# Altium PCB Klotz.PcbDoc
Units mm, origin at the board's own origin, x right, y up, seen from the top; angles counter-clockwise.
Board outline 48 x 51 mm, 2 copper layers (Top Layer, Bottom Layer); 40 components, 33 nets, 160 pads, 28 vias.
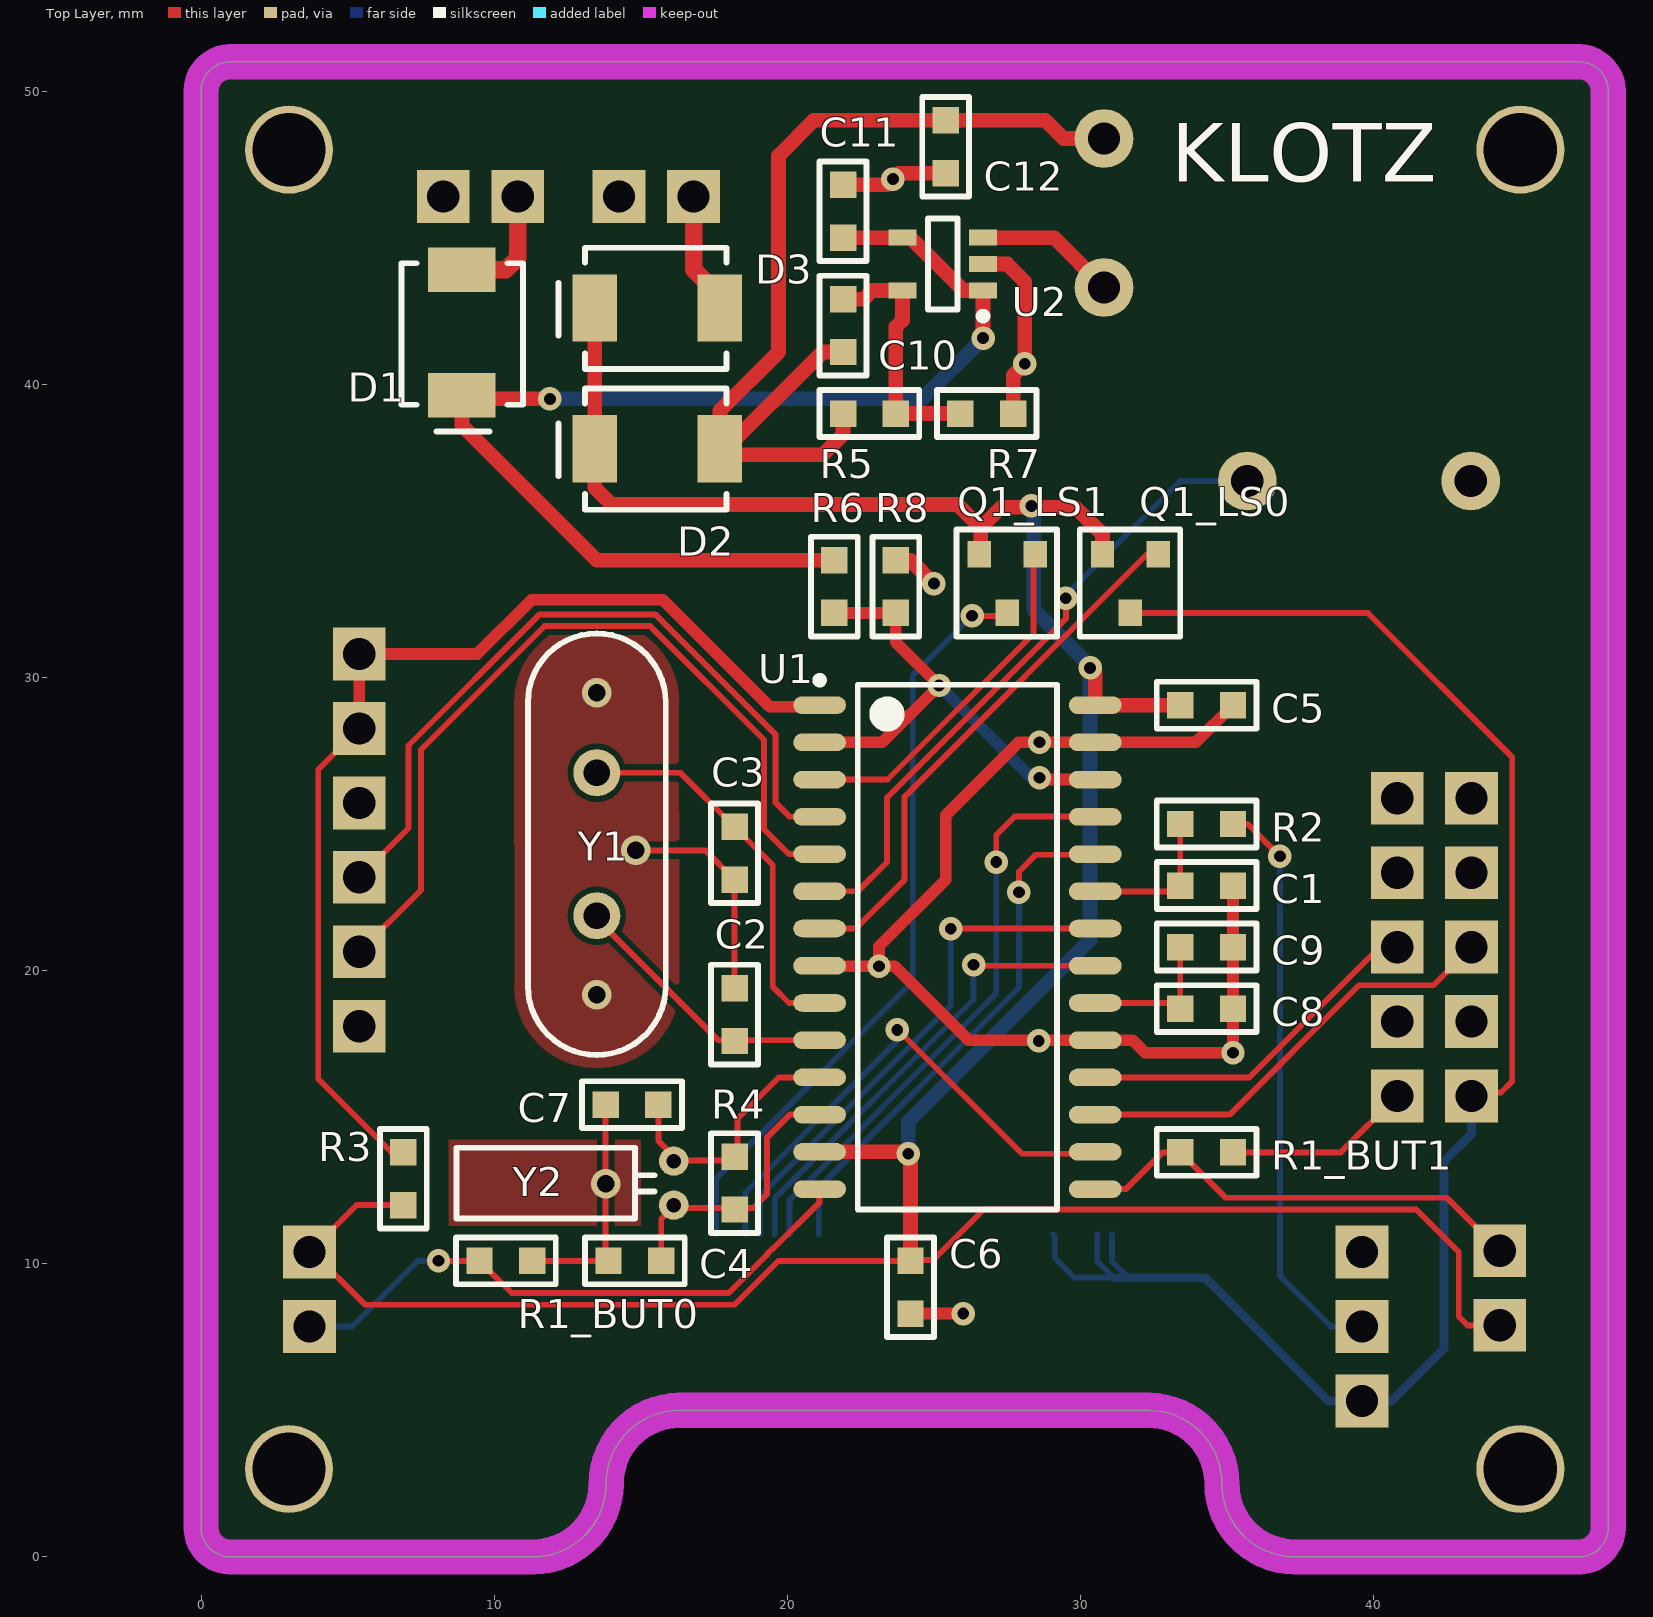
[diagram p0: Top Layer view]
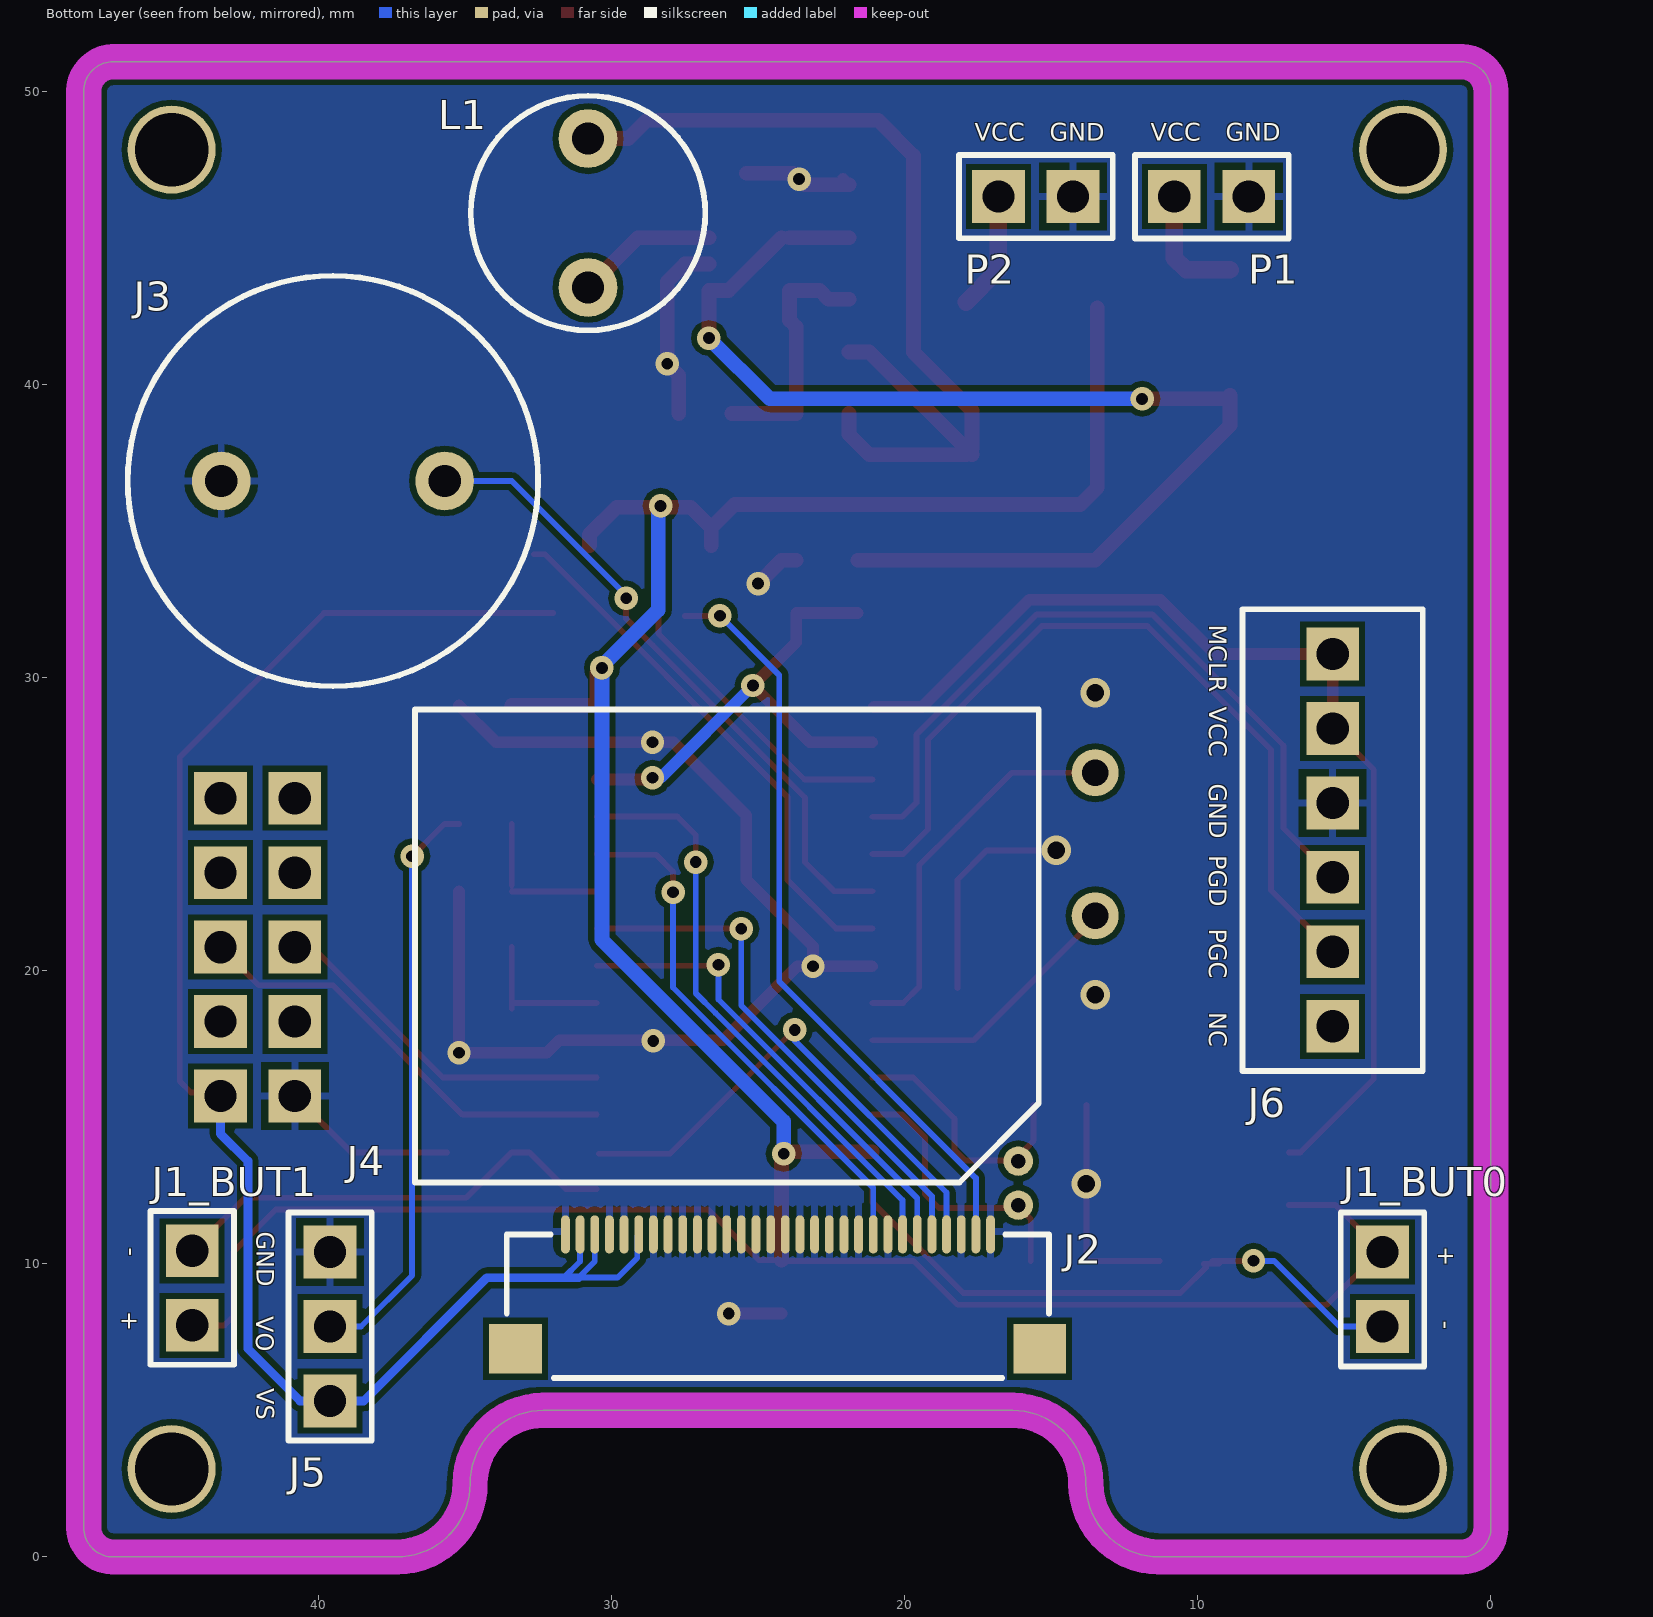
[diagram p1: Bottom Layer view, seen from below]
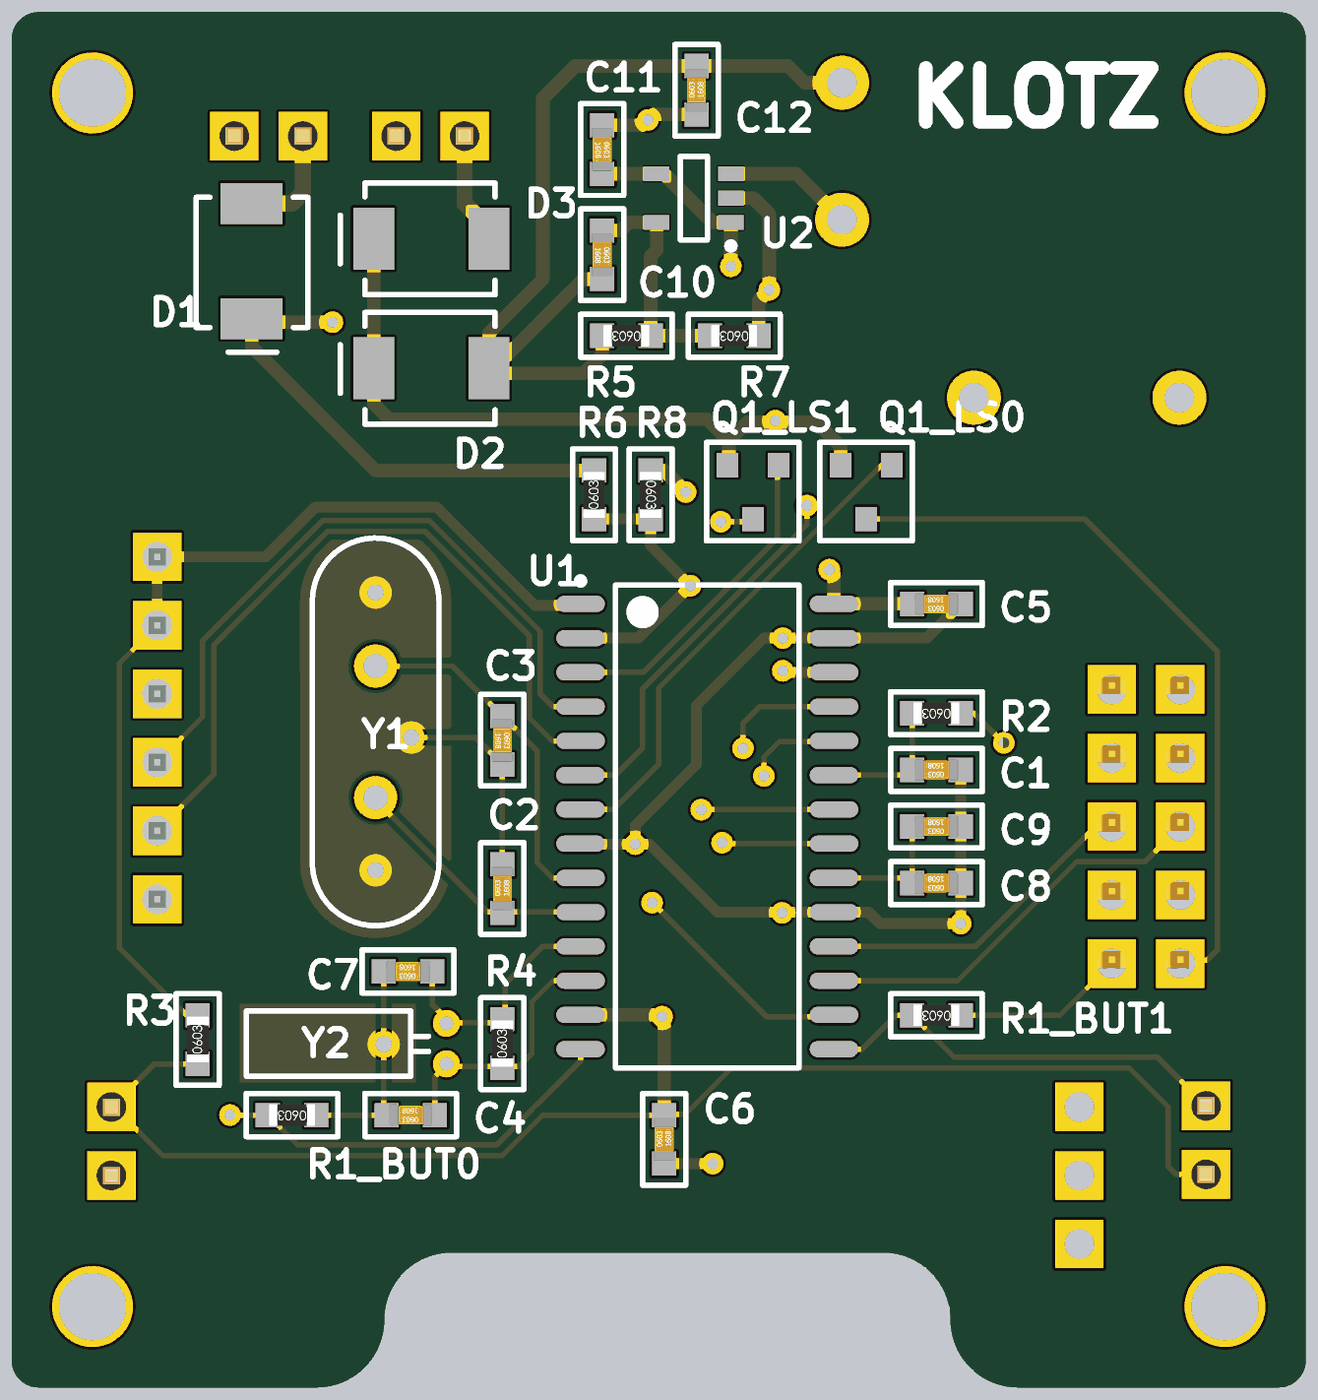
[diagram p2: 3D render of the assembled board from above, using the file's embedded part models]
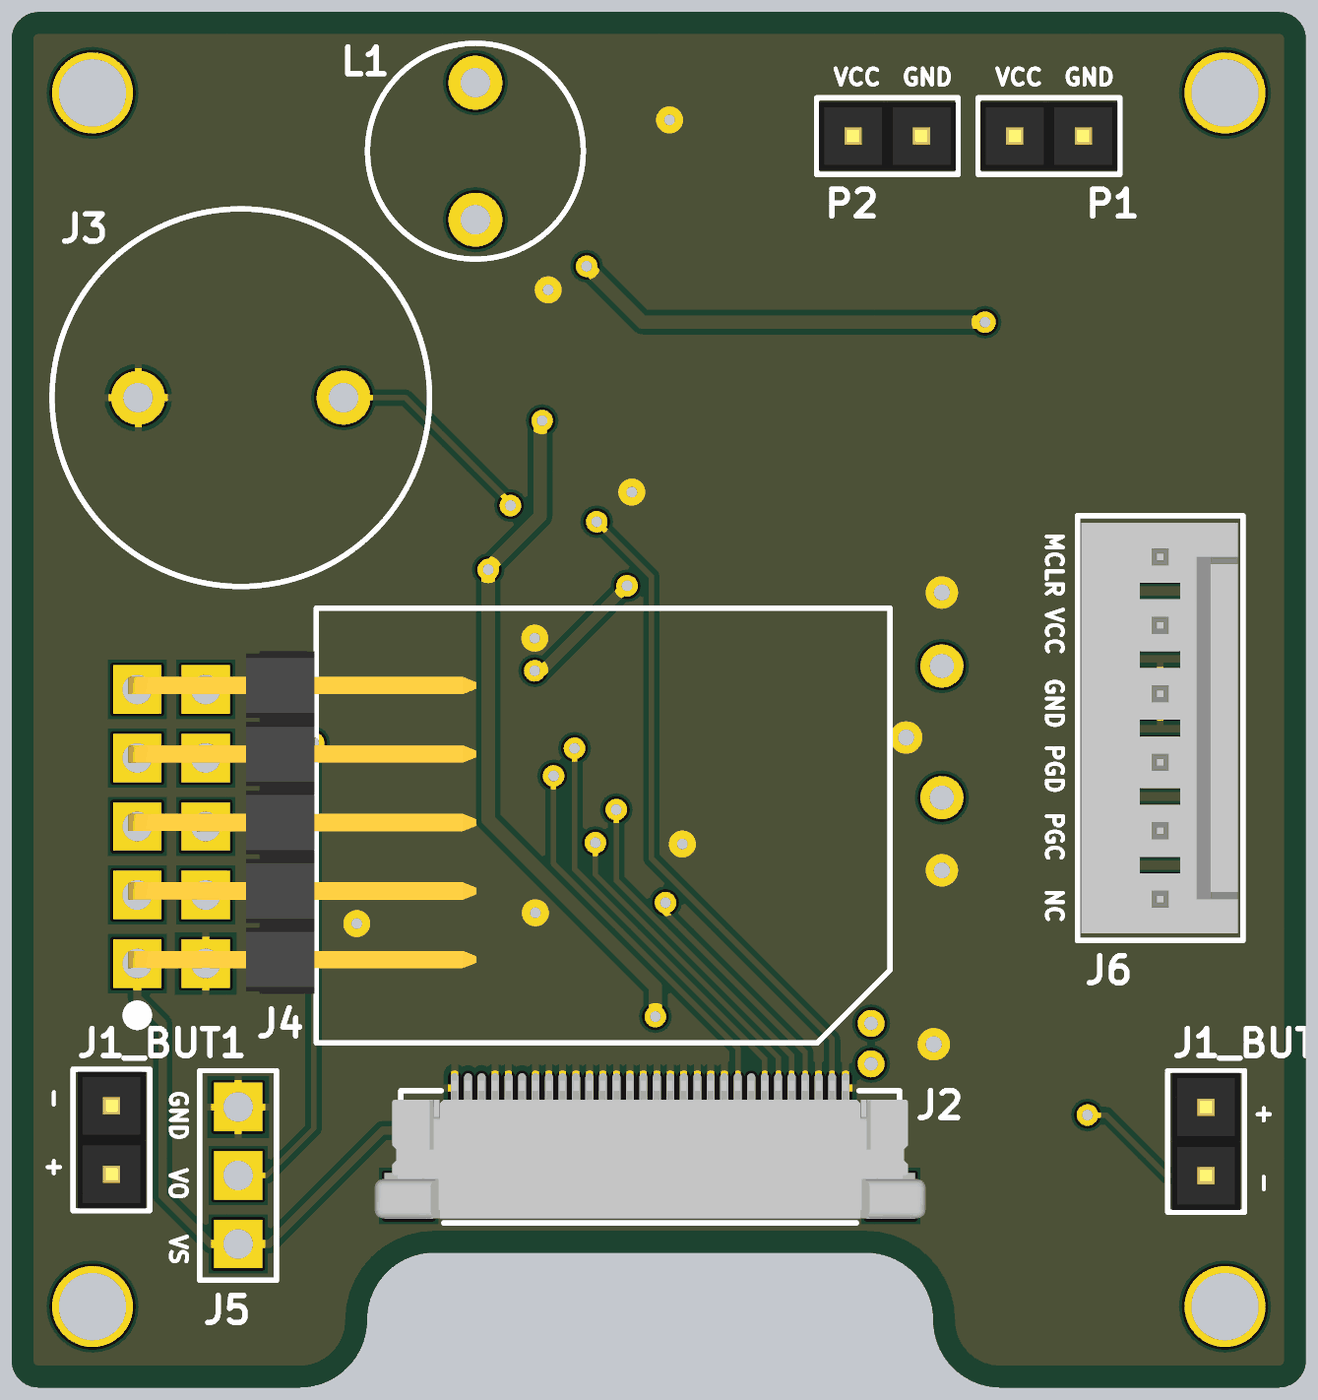
[diagram p3: 3D render of the assembled board from below, using the file's embedded part models]

## Layer stack, top to bottom
Top Solder: solder mask 0.0102, Solder Resist, Dk 3.5
Top Layer: signal copper 0.0356
Dielectric 1: dielectric 0.32, FR-4, Dk 4.8
Bottom Layer: signal copper 0.0356
Bottom Solder: solder mask 0.0102, Solder Resist, Dk 3.5

## Board outline
0,1 ccw(c1,1) 1,0 11.32,0 ccw(c11.32,2.5) 13.82,2.5 cw(c16.32,2.5) 16.32,5 32.32,5 cw(c32.32,2.5) 34.82,2.5 ccw(c37.32,2.5) 37.32,0 47,0 ccw(c47,1) 48,1 48,50 ccw(c47,50) 47,51 1,51 ccw(c1,50) 0,50

## Design rules (kind name [scope] priority, off if disabled: settings)
Clearance [All] p1: gap=0.2
MinimumSolderMaskSliver [All] p1: minsoldermaskwidth=0.1
PolygonConnect PolygonConnect_1 [All vs isVia] p1: connectstyle=Direct reliefconductorwidth=0.254 reliefentries=4 polygonreliefangle="90 Angle" airgapwidth=0.254
PolygonConnect [All] p2: connectstyle=Relief reliefconductorwidth=0.254 reliefentries=4 polygonreliefangle="90 Angle" airgapwidth=0.254
RoutingVias [All] p1: holewidth=0.3 width=0.2 viastyle="Through Hole" minholewidth=0.711 minwidth=1.27 maxholewidth=0.711 maxwidth=1.27
SilkToSilkClearance [All] p1: silktosilkclearance=0.1
SilkToSolderMaskClearance [IsPad] p1: minsilkscreentomaskgap=0.2 clearancetoexposedcopper=TRUE
SolderMaskExpansion [All] p1: expansion=0.1
UnpouredPolygon [All] p1: allowunpoured=FALSE
Width [All] p1: maxlimit=0.7 minlimit=0.2 preferedwidth=0.2 minimp=50.000000 maximp=50.000000 favimp=50.000000
26 further rules are at their usual default settings.

## Classes and differential pairs
component class BUT0: J1_BUT0 J6_BUT0 J7_BUT0 R1_BUT0 S2_BUT0
component class BUT1: J1_BUT1 J6_BUT1 J7_BUT1 R1_BUT1 S2_BUT1
component class LS0: Q1_LS0
component class LS1: Q1_LS1 T1_LS1
component class PERIPH: C1 CBUZZ G1 J2 J3 J4 J5 J7 j7 R2 S1
component class PIC32: C2 C3 C4 C5 C6 C7 C8 C9 J6 R3 R4 U1 Y1 Y2
component class POWER: C10 C11 C12 CBATA CBATB D1 D2 D3 L1 P1 P2 R5 R6 R7 R8 U2
net class BUT[0..1]: BUT0 BUT1
net class LS[0..1]: LS0 LS1
net class PERIPH[0..1]: PERIPH0 PERIPH1
channel class button: BUT0 BUT1
channel class loadswitch: LS0 LS1

## Components (designator, comment, footprint, x,y, rotation, side; value= is the part's Value field where it differs from the comment)
C1 "100nF" CAPACITOR 35.2,22.9 r180 top
C2 "52pF" CAPACITOR 18.2,17.6 r90 top
C3 "52pF" CAPACITOR 18.2,24.9 r270 top
C4 "18pF" CAPACITOR 15.7,10.1 r180 top
C5 "100nF" CAPACITOR 35.2,29.05 r180 top
C6 "100nF" CAPACITOR 24.2,8.3 r90 top
C7 "18pF" CAPACITOR 15.6,15.425 r180 top
C8 "10uF" CAPACITOR 35.2,18.7 r180 top
C9 "1uF" CAPACITOR 35.2,20.8 r180 top
C10 "10uF" CAPACITOR 21.9,42.9 r270 top
C11 "4.7uF" CAPACITOR 21.9,46.8 r270 top
C12 "10uF" CAPACITOR 25.4,47.2 r90 top
D1 "STPS1L30U" Schottky 8.9,43.9 r270 top
D2 "STPS1L30U" Schottky 17.7,37.8 r180 top
D3 "STPS1L30U" Schottky 17.7,42.6 r180 top
J1_BUT0 "Header 2" "Header 2 BUTTON" 3.7,10.4 r270 bottom (schematic designator J1)
J1_BUT1 "Header 2" "Header 2 BUTTON" 44.3,7.9 r90 bottom (schematic designator J1)
J2 "TFT Connector" SCREEN 17.07,11 r0 bottom
J3 "KPEG242" BUZZER 39.5,36.7 r0 bottom
J4 "Connector MPU-6050" GYROSCOPE 40.8,20.8 r270 bottom
J5 "AD22103KTZ" TEMP 39.6,10.4 r270 bottom
J6 "Debugger" DEBUG 5.4,30.8 r270 bottom
L1 "2.2uH" Inductor 30.8,43.3 r90 bottom
P1 "Header 2" "Header 2 BATTERY" 10.8,46.4 r180 bottom
P2 "Header 2" "Header 2 BATTERY" 16.8,46.4 r180 bottom
Q1_LS0 "BSS84" TRANSISTOR 31.7,32.2 r180 top (schematic designator Q1)
Q1_LS1 "BSS84" TRANSISTOR 27.5,32.2 r180 top (schematic designator Q1)
R1_BUT0 "10K" Resistor 11.3,10.1 r180 top (schematic designator R1)
R1_BUT1 "10K" Resistor 35.2,13.8 r180 top (schematic designator R1)
R2 "1k" Resistor 35.2,25 r180 top
R3 "4.7k" Resistor 6.9,12 r90 top
R4 "1MOhm" Resistor 18.2,11.85 r90 top
R5 "500K" Resistor 23.7,39 r180 top
R6 "1K" Resistor 21.6,32.2 r90 top
R7 "100K" Resistor 27.7,39 r180 top
R8 "1K" Resistor 23.7,34 r270 top
U1 "PIC32MX170F256B" PIC32 25.8,20.8 r0 top
U2 "RT8008GB" REGULATEUR 25.3,44.1 r180 top
Y1 "8MHz" OSC1 13.5,26.75 r270 top
Y2 "32.768KHz" OSC2 16.125,13.5 r270 top

## Footprints (in the part's own frame and the unit in brackets; to place one, negate y for a bottom-side part, rotate by r counter-clockwise, add the part's x,y. Pads: shape width x height; smd on the part's side, far side on the other; paste and mask are expansions set on the pad)
BUZZER [mm] "Buzzer"
  round 2 hole 1.1: 1(-3.81,0) 2(3.81,0)
  silkscreen extent -7,-7 7,7, body extent -7.01,-7.01 7.01,7.01, height 7.5
CAPACITOR [mm] "Capacitor"
  rect 0.9x0.9 smd: 1(0,0) 2(1.8,0)
  silkscreen extent -0.8,-0.8 2.6,0.8, body extent 0.1,-0.4 1.7,0.4, height 0.8
DEBUG [mm] "Connecteur debugger"
  rect 1.8x1.8 hole 1.1: 1(0,0) 2(2.54,0) 3(5.08,0) 4(7.62,0) 5(10.16,0) 6(12.7,0)
  rect 14x0.3 on Bottom Overlay: 5(6.35,2.4)
  silkscreen extent -1.52,-3.07 14.22,3.07, body extent -1.27,-2.93 13.97,2.87, height 11.72
GYROSCOPE [mm] "Connecteur gyroscope"
  rect 1.8x1.8 hole 1.1: 1(5.08,-2.54) 2(5.08,0) 3(2.54,-2.54) 4(2.54,0) 5(0,-2.54) 6(0,0) 7(-2.54,-2.54) 8(-2.54,0) 9(-5.08,-2.54) 10(-5.08,0)
  round 1.1 on Bottom Overlay: 1(7,-2.54)
  silkscreen extent -8.1,4.1 8.03,25.37, body extent -8.08,-2.87 8.03,25.33, height 5.14
"Header 2 BATTERY" [mm] "Connecteur"
  rect 1.8x1.8 hole 1.1: 1(0,0) 2(2.54,0)
  silkscreen extent -1.35,-1.42 3.9,1.42, body extent -1.27,-1.27 3.81,1.27, height 8.54
"Header 2 BUTTON" [mm] "Connecteur"
  rect 1.8x1.8 hole 1.1: 1(0,0) 2(2.54,0)
  silkscreen extent -1.35,-1.42 3.9,1.42, body extent -1.27,-1.28 3.81,1.26, height 8.54
Inductor [mm]
  round 2 hole 1.1: 1(0,0) 2(5.08,0)
  silkscreen extent -1.46,-4 6.54,4, body extent -1.47,-4.01 6.55,4.01, height 7.5
OSC1 [mm] "Quartz 8MHZ"
  round 1.6 hole 0.9: 1(0,0) 2(4.88,0)
  silkscreen extent -4.75,-2.35 9.63,2.35, body extent -4.76,-2.36 9.64,2.36, height 4
OSC2 [mm] "Quartz 32.768khZ"
  round 1 hole 0.5: 1(0,0) 2(1.5,0)
  silkscreen extent -0.46,-7.42 1.96,-0.66, body extent -0.46,-7.42 1.96,-1.32, height 2.9
PIC32 [mm] "PIC32MX170F256B-I/SO"
  oval 1.8x0.6 smd: 1(-4.7,8.255) 2(-4.7,6.985) 3(-4.7,5.715) 4(-4.7,4.445) 5(-4.7,3.175) 6(-4.7,1.905) 7(-4.7,0.635) 8(-4.7,-0.635) 9(-4.7,-1.905) 10(-4.7,-3.175) 11(-4.7,-4.445) 12(-4.7,-5.715) 13(-4.7,-6.985) 14(-4.7,-8.255) 15(4.7,-8.255) 16(4.7,-6.985) 17(4.7,-5.715) 18(4.7,-4.445) 19(4.7,-3.175) 20(4.7,-1.905) 21(4.7,-0.635) 22(4.7,0.635) 23(4.7,1.905) 24(4.7,3.175) 25(4.7,4.445) 26(4.7,5.715) 27(4.7,6.985) 28(4.7,8.255)
  silkscreen extent -4.82,-8.95 3.4,9.23, body extent -3.8,-8.95 3.8,8.95, height 2.65
REGULATEUR [mm] "RT8008"
  rect 0.95x0.55 smd mask+0.05: 1(-1.375,0.9) 2(-1.375,0) 3(-1.375,-0.9) 4(1.375,-0.9) 5(1.375,0.9)
  silkscreen extent -1.5,-1.55 0.5,1.9, body extent -0.9,-1.55 0.9,1.55, height 1.3
Resistor [mm] "Resistor"
  rect 0.9x0.9 smd: 1(0,0) 2(1.8,0)
  silkscreen extent -0.8,-0.8 2.6,0.8, body extent 0.05,-0.4 1.75,0.4, height 0.56
Schottky [mm] "Diode de redressement"
  rect 1.52x2.3 smd: 1(0,0) 2(4.27,0)
  silkscreen extent -0.23,-2.06 5.51,2.08, body extent -0.03,-1.8 4.3,1.8, height 2.45
SCREEN [mm]
  oval 0.3x1.3 smd: 1(14.5,0) 2(14,0) 3(13.5,0) 4(13,0) 5(12.5,0) 6(12,0) 7(11.5,0) 8(11,0) 9(10.5,0) 10(10,0) 11(9.5,0) 12(9,0) 13(8.5,0) 14(8,0) 15(7.5,0) 16(7,0) 17(6.5,0) 18(6,0) 19(5.5,0) 20(5,0) 21(4.5,0) 22(4,0) 23(3.5,0) 24(3,0) 25(2.5,0) 26(2,0) 27(1.5,0) 28(1,0) 29(0.5,0) 30(0,0)
  rect 1.8x1.7 smd: ""(-1.675,3.9) ""(16.2,3.9)
  silkscreen extent -2,0 16.5,4.9, body extent -2.96,-0.37 17.47,4.74, height 2.05
TEMP [mm] "Connecteur"
  rect 1.8x1.8 hole 1.1: 1(5.08,0) 2(2.54,0) 3(0,0)
  silkscreen extent -1.35,-1.42 6.43,1.42, body extent -1.35,-1.42 6.43,1.42, height 10
TRANSISTOR [mm] "BSS84"
  rect 0.8x0.9 smd: 1(-0.95,-2) 2(0.95,-2) 3(0,0)
  silkscreen extent -1.7,-2.84 1.73,0.81, body extent -1.7,-2.84 1.73,0.81, height 1.2

## Part data
C1 C2 C3 C4 C5 C6 C7 C8 C9 C10 C11 C12: library part Cap, "Capacitor"
D1 D2 D3: library part Diode, "Diode Schottky"
J2: library part MCT0144C6W128128PML
J3: "Buzzer"
J5: "Temp sensor"
J6: library part "Header 6", "DEB Connector"
L1: library part Inductor, "Inductor"
Q1_LS0 Q1_LS1: "Transistor"
R1_BUT0 R1_BUT1 R2 R3 R4 R5 R6 R7 R8: library part Res1, "Resistor"
U1: "PIC32"
U2: "Voltage Regulator"
Y1 Y2: library part XTAL, "Crystal Oscillator"

## Free pads (board coordinates)
  round 3 hole 2.5: ""(3,3) ""(3,48) ""(45,48) ""(45,3)

## Via types
v1: diameter 0.8, hole 0.4, Top Layer to Bottom Layer, 24 vias
v2: diameter 1, hole 0.6, Top Layer to Bottom Layer, 4 vias

## Nets (pads, with @x,y where several pads share a name; then routed paths per layer and width w, separated by ;. In a path a pad name is that pad's centre, name@x,y a point inside that pad or via, vN(x,y) a via of type N, cw(c..) or ccw(c..) an arc to the next point about the centre after c; other vN are vias at no path point)
BUT0: J1_BUT0.2 R1_BUT0.2 U1.14 | length 21.4
  Top Layer w0.2: v1(8.1,10.1) R1_BUT0.2 ; R1_BUT0.2@9.274,10 9.795,10 9.697,9.903 10.6,9 18,9 19.3,10.3 19.3,10.324 19.476,10.5 19.5,10.5 21.1,12.1 U1.14
  Bottom Layer w0.2: J1_BUT0.2@3.2,7.86 5.16,7.86 7.4,10.1 v1(8.1,10.1)
BUT1: J1_BUT1.2 R1_BUT1.2 U1.15 | length 15.7
  Top Layer w0.2: U1.15 31.545,12.545 32.8,13.8 R1_BUT1.2 34.95,12.25 42.49,12.25 J1_BUT1.2
GND: C1.1 C2.2 C3.2 C4.2 C5.1 C6.1 C7.2 C8.1 C9.1 C11.1 C12.1 J2.1 J2.4 J2.5 J2.7 J2.8 J2.9 J2.10 J2.11 J2.12 J2.13 J2.14 J2.15 J2.16 J2.17 J2.18 J2.19 J2.20 J2.21 J2.23 J2.28 J2.30 J3.2 J4.2 J5.3 J6.3 P1.2 P2.2 R1_BUT0.1 R1_BUT1.1 R7.1 R8.1 U1.8 U1.19 U1.27 U2.2 | length 73.4
  Top Layer w0.2: R1_BUT0.1 C4.2 13.8,10.2 C7.2 ; v2(14.825,24.1) 17.2,24.1 C3.2 C2.2 ; R1_BUT1.1@35.6,13.8 38.88,13.8 J4.2
  Top Layer w0.4: U1.8@21.115,20.15 v1(23.125,20.15) ; C11.1 C11.1@22.1,47 ; C6.1 v1(26,8.3) ; C1.1@35.2,22.7 v1(35.2,17.2) 32.2,17.2 31.775,17.625 U1.19 26.182,17.625 23.657,20.15 v1(23.125,20.15) ; C5.1 33.935,27.785 U1.27 v1(28.6,27.785) 27.885,27.785 25.4,25.3 25.4,23.1 23.125,20.825 v1(23.125,20.15)
  Top Layer w0.5: C11.1 23.4,46.8 23.8,47.2 C12.1 ; R8.1 24.2,34 v1(25,33.2) ; U2.2 27.5,44.1 28.1,43.5 v1(28.1,40.7) 27.7,40.3 R7.1
  other v1: 28.575,17.6 23.6,47
  other v2: 13.8,12.725 13.5,19.175 13.5,29.475
IND: R6.1 R8.2 U1.2 U1.26 | length 16.6
  Top Layer w0.4: U1.2 23.235,27.785 v1(25.175,29.725) 23.7,31.2 R8.2 R6.1 ; v1@28.66,26.515 U1.26
  Bottom Layer w0.4: v1(25.175,29.725) 28.325,26.575 v1(28.6,26.575)
LS0: Q1_LS0.1 U1.7 | length 18.5
  Top Layer w0.2: U1.7 22.335,21.435 24,23.1 24,25.934 32.266,34.2 Q1_LS0.1
LS1: Q1_LS1.1 U1.3 | length 12.1
  Top Layer w0.2: U1.3 23.415,26.515 28.4,31.5 28.4,34.15 Q1_LS1.1
MCLR: J6.1 J6.2 R3.2 U1.1 | length 36.9
  Top Layer w0.2: J6.2 4,26.86 4,16.3 6.5,13.8 R3.2
  Top Layer w0.4: J6.2 J6.1 9.425,30.8 11.275,32.65 15.75,32.65 19.4,29 U1.1@21.045,29
NetC1_2: C1.2 R2.2 U1.23 | length 5
  Top Layer w0.2: U1.23@30.505,22.7 C1.2@33.4,22.7 ; C1.2 R2.2
NetC8_2: C8.2 C9.2 U1.20 | length 5
  Top Layer w0.2: U1.20@30.505,18.9 C8.2@33.4,18.9 ; C8.2 C8.2@33.4,18.9 ; C9.2 C8.2@33.4,18.9
NetC10_1: C10.1 R5.1 R7.2 U2.5 | length 8.6
  Top Layer w0.5: C10.1 22.6,42.9 22.9,43.2 U2.5 23.925,42.175 23.7,41.95 R5.1 R7.2
NetC10_2: C10.2 C12.2 D2.1 L1.2 R5.2 | length 33.6
  Top Layer w0.4: D2.1 D2.1@17.9,37.6
  Top Layer w0.5: D2.1@17.7,37.6 21.2,41.1 C10.2 ; D2.1 17.7,39.1 19.7,41.1 19.7,47.8 20.9,49 C12.2 28.8,49 29.42,48.38 L1.2 ; D2.1@17.9,37.6 21.2,37.6 21.9,38.3 R5.2
NetC11_2: C11.2 D1.2 R6.2 U2.1 U2.4 | length 41.3
  Top Layer w0.4: U2.4 U2.4@24.2,45
  Top Layer w0.5: D1.2 8.9,38.6 13.5,34 R6.2 ; D1.2@9.03,39.5 v1(11.9,39.5) ; C11.2 U2.4 ; U2.4@24.2,45 26,43.2 U2.1 v1(26.675,41.575)
  Bottom Layer w0.5: v1(11.9,39.5) 24.6,39.5 v1(26.675,41.575)
NetD1_1: D1.1 P1.1 | length 4.2
  Top Layer w0.6: D1.1 10.4,43.9 10.8,44.3 P1.1
NetD3_1: D3.1 P2.1 | length 4.1
  Top Layer w0.6: P2.1 16.8,43.9 D3.1@17.9,42.8
NetJ2_22: J2.22 U1.24 | length 18
  Top Layer w0.2: v1(27.9,22.675) 27.9,23.375 28.475,23.95 U1.24@30.425,23.95 ; U1.24@30.475,24 U1.24
  Bottom Layer w0.2: J2.22 21.07,12.595 27.9,19.425 v1(27.9,22.675)
NetJ2_24: J2.24 U1.25 | length 20.2
  Top Layer w0.2: v1(27.125,23.7) 27.125,24.625 27.75,25.25 U1.25@30.395,25.25 ; U1.25@30.445,25.3 U1.25
  Bottom Layer w0.2: J2.24 20.07,12.17 26.45,18.55 27.125,19.225 v1(27.125,23.7)
NetJ2_25: J2.25 U1.21 | length 16.2
  Top Layer w0.2: v1@26.35,20.165 U1.21
  Bottom Layer w0.2: J2.25 19.57,12.236 26.35,19.016 v1(26.35,20.2)
NetJ2_26: J2.26 U1.22 | length 18
  Top Layer w0.2: v1@25.575,21.435 U1.22
  Bottom Layer w0.2: J2.26 19.07,12.301 25.575,18.806 v1(25.575,21.425)
NetJ2_27: J2.27 U1.16 | length 17.6
  Top Layer w0.2: v1(23.751,17.976) 23.774,17.976 28,13.75 U1.16@30.435,13.75
  Bottom Layer w0.2: J2.27 18.57,12.429 23.751,17.61 v1(23.751,17.976)
NetJ3_1: J3.1 U1.6 | length 22.1
  Top Layer w0.2: U1.6 22.405,22.705 23.4,23.7 23.4,25.9 28.6,31.1 29.5,32 v1(29.5,32.7)
  Bottom Layer w0.2: v1@29.65,32.7 29.65,32.95 33.4,36.7 J3.1
NetJ4_5: J4.5 U1.17 | length 15.2
  Top Layer w0.2: U1.17 35.085,15.085 39.5,19.5 42.04,19.5 J4.5
NetJ4_6: J4.6 U1.18 | length 12.1
  Top Layer w0.2: U1.18 35.755,16.355 40.2,20.8 J4.6
NetJ5_2: J5.2 R2.1 | length 19.9
  Top Layer w0.2: R2.1 35.7,25 v1(36.8,23.9)
  Bottom Layer w0.2: v1(36.8,23.9) 36.8,9.6 38.54,7.86 J5.2
NetL1_1: L1.1 U2.3 | length 4.8
  Top Layer w0.5: U2.3 29.1,45 L1.1
PERIPH0: J2.2 J2.3 J2.6 J4.1@43.34,15.72 J5.1 Q1_LS0.3 | length 56.6
  Top Layer w0.2: Q1_LS0.3@32,32.2 39.8,32.2 44.725,27.275 44.725,16.225 44.34,15.84 J4.1@43.34,15.84
  Bottom Layer w0.2: J2.6 29.12,10.95 29.12,10.196 29.791,9.525 31.125,9.525 30.57,10.08 J2.3 ; J2.2 31.07,10.08 31.625,9.525
  Bottom Layer w0.3: 31.125,9.525 31.625,9.525 34.25,9.525 38.455,5.32 J5.1 40.62,5.32 42.4,7.1 42.4,13.5 43.34,14.44 J4.1@43.34,15.72
PERIPH1: J2.29 Q1_LS1.3 | length 25.9
  Top Layer w0.2: v1(26.3,32.1) Q1_LS1.3@27.5,32.1
  Bottom Layer w0.2: J2.29 17.57,12.92 24.275,19.625 24.275,30.075 v1(26.3,32.1)
PGC: J6.5@5.4,20.64 U1.5 | length 28.1
  Top Layer w0.2: J6.5@5.4,20.64 7.5,22.74 7.5,27.534 11.716,31.75 15.325,31.75 19.2,27.875 19.2,24.825 20.05,23.975 U1.5
PGD: J6.4 U1.4 | length 25.3
  Top Layer w0.2: J6.4 7.075,24.855 7.075,27.675 11.55,32.15 15.491,32.15 19.6,28.041 19.6,25.725 20.08,25.245 U1.4
V3P3: C5.2 C6.2 D2.2 D3.2 J1_BUT0.1 J1_BUT1.1 Q1_LS0.2 Q1_LS1.2 R3.1 U1.13 U1.28 | length 111.5
  Top Layer w0.2: J1_BUT0.1 5.3,12 R3.1 ; J1_BUT0.1@3.75,10.45 5.6,8.6 18.2,8.6 19.7,10.1 C6.2 ; C6.2@24.2,10.125 24.975,10.125 26.7,11.85 41.45,11.85 42.9,10.4 42.9,8.2 43.2,7.9 J1_BUT1.1
  Top Layer w0.4: v1@24.06,13.815 v1@24.2,13.675 ; v1(30.325,30.325) v1@30.5,30.15
  Top Layer w0.5: D3.2 D2.2 13.43,36.47 14,35.9 25.8,35.9 26.6,35.1 ; U1.13 v1@24.06,13.815 ; C6.2@24.2,10.125 v1@24.2,13.675 ; Q1_LS1.2@26.6,34.5 26.6,35.1 ; v1@30.5,30.15 U1.28 C5.2@33.395,29.055 ; Q1_LS0.2@30.75,34.5 30.75,34.875 29.825,35.8 27.3,35.8 26.6,35.1
  Bottom Layer w0.4: v1(28.325,35.85) v1@28.4,35.775
  Bottom Layer w0.5: v1(24.125,13.75) 24.125,14.85 30.325,21.05 30.325,30.375 28.4,32.3 v1@28.4,35.775
X1: C2.1 U1.10 Y1.2 | length 9.5
  Top Layer w0.2: Y1.2@13.345,21.925 17.645,17.625 U1.10
X2: C3.1 U1.9 Y1.1 | length 13.3
  Top Layer w0.2: Y1.1 16.35,26.75 C3.1 19.5,23.6 19.5,19.45 20.055,18.895 U1.9
X3: C4.1 R4.1 U1.12 Y2.2 | length 9.4
  Top Layer w0.2: C4.1 15.7,11.525 16.075,11.9 18.825,11.9 19.3,12.375 19.3,14.3 20.085,15.085 U1.12
X4: C7.1 R4.2 U1.11 Y2.1 | length 8.8
  Top Layer w0.2: C7.1 15.6,14.2 16.1,13.7 16.275,13.525 17.925,13.525 18.3,13.9 18.3,14.95 19.705,16.355 U1.11
pads on no net: J2. J4.1@43.34,13.8 J4.3 J4.4 J4.7 J4.8 J4.9 J4.10 J6.5@3,24.45 J6.6

## Polygon pours and split planes (outlines as drawn)
GND on Bottom Layer "GND Poly" (solid, pour order 22): 0,1 ccw(c1,1) 1,0 11.32,0 ccw(c11.32,2.5) 13.82,2.5 cw(c16.32,2.5) 16.32,5 32.32,5 cw(c32.32,2.5) 34.82,2.5 ccw(c37.32,2.5) 37.32,0 47,0 ccw(c47,1) 48,1 48,50 ccw(c47,50) 47,51 1,51 ccw(c1,50) 0,50
GND on Top Layer "GND OSC1" (solid, pour order 21): 10.7,19.47 10.7,29.15 cw(c13.5,29.15) 16.3,29.15 16.3,19.47 cw(c13.5,19.47)
GND on Top Layer "GND OSC2" (solid, pour order 23): 8.45,11.3 8.45,14.225 15,14.225 15,11.3

## Keep-outs
Keep-Out Layer:
  the board outline again, w1.2

## Silkscreen, mask and mechanical layers (free items; w line width, h text height)
Top Overlay:
  text "KLOTZ" at 33.1,46.9 h2
Mechanical 7:
  lines w0.254: -2.326,50.999 -1.704,50.999 ; -2.204,49.475 -1.7,51 ; -2.062,1.522 -1.55,0 ; -1.954,50.999 -1.446,51.001 ; -1.804,-0.001 -1.296,0.001 ; -1.64,30.477 -1.7,51 ; -1.61,20.523 -1.55,0 ; -1.188,49.478 -1.7,51 ; -1.046,1.525 -1.55,0 ; 0,52.696 0,53.204 ; 1.524,52.442 0,52.95 ; 1.524,53.458 0,52.95 ; 18.896,52.95 0,52.95 ; 29.104,52.95 48,52.95 ; 46.476,52.442 48,52.95 ; 46.476,53.458 48,52.95 ; 48,52.696 48,53.204
  text "48 (mm)" at 19.15,52.036 h1.52
  text "51 (mm)" at -2.553,30.22 h1.52 r270.17
Drill Drawing:
  circle w0.025: c51.289,29.7 r0.635
  lines w0.025: 50.654,25.255 51.924,25.255 51.924,26.525 50.654,26.525 50.654,25.255 ; 50.654,34.145 51.924,34.145 51.289,32.875 50.654,34.145 ; 50.654,37.003 50.971,37.003 51.289,36.685 51.606,37.003 51.924,37.003 51.606,37.32 51.924,37.638 51.606,37.638 51.289,37.955 50.971,37.638 50.654,37.638 50.971,37.32 50.654,37.003 ; 50.654,41.765 51.924,41.765 51.289,40.495 50.654,41.765 ; 50.654,44.623 50.971,44.623 51.289,44.305 51.606,44.623 51.924,44.623 51.606,44.94 51.924,45.258 51.606,45.258 51.289,45.575 50.971,45.258 50.654,45.258 50.971,44.94 50.654,44.623 ; 50.908,41.511 51.67,41.511 51.289,40.749 50.908,41.511 ; 50.908,44.75 51.098,44.75 51.289,44.559 51.479,44.75 51.67,44.75 51.479,44.94 51.67,45.131 51.479,45.131 51.289,45.321 51.098,45.131 50.908,45.131 51.098,44.94 50.908,44.75
  lines w0.381: 48.923,24.112 147.449,24.112 ; 48.923,46.972 147.449,46.972 ; 62.916,20.302 62.916,50.782 ; 80.64,20.302 80.64,50.782 ; 114.819,20.302 114.819,50.782 ; 127.668,20.302 127.668,50.782 ; 48.923,20.302 147.449,20.302 147.449,50.782 48.923,50.782 48.923,20.302
  text "Symbol" at 51.209,48.115 h1.83
  text "Hit Count" at 64.059,48.115 h1.83
  text "Finished Hole Size" at 81.783,48.115 h1.83
  text "Plated" at 115.962,48.115 h1.83
  text "Hole Type" at 128.811,48.115 h1.83
  text "4" at 64.059,44.305 h1.52
  text "2.500mm (98.43mil)" at 81.783,44.305 h1.52
  text "PTH" at 115.962,44.305 h1.52
  text "Round" at 128.811,44.305 h1.52
  text "31" at 64.059,40.495 h1.52
  text "1.100mm (43.31mil)" at 81.783,40.495 h1.52
  text "PTH" at 115.962,40.495 h1.52
  text "Round" at 128.811,40.495 h1.52
  text "2" at 64.059,36.685 h1.52
  text "0.900mm (35.43mil)" at 81.783,36.685 h1.52
  text "PTH" at 115.962,36.685 h1.52
  text "Round" at 128.811,36.685 h1.52
  text "4" at 64.059,32.875 h1.52
  text "0.600mm (23.62mil)" at 81.783,32.875 h1.52
  text "PTH" at 115.962,32.875 h1.52
  text "Round" at 128.811,32.875 h1.52
  text "2" at 64.059,29.065 h1.52
  text "0.500mm (19.69mil)" at 81.783,29.065 h1.52
  text "PTH" at 115.962,29.065 h1.52
  text "Round" at 128.811,29.065 h1.52
  text "24" at 64.059,25.255 h1.52
  text "0.400mm (15.75mil)" at 81.783,25.255 h1.52
  text "PTH" at 115.962,25.255 h1.52
  text "Round" at 128.811,25.255 h1.52
  text "67 Total" at 64.059,21.445 h1.52
BoardOutline:
  the board outline again, w0.1

## Text inside footprints (layer, text, board x,y; h text height)
J1_BUT0: Bottom Overlay "+" at 1.8,10.6 h0.6 r90; Bottom Overlay "-" at 1.8,8.05 h0.6 r90
J1_BUT1: Bottom Overlay "+" at 46.2,7.7 h0.6 r270; Bottom Overlay "-" at 46.2,10.25 h0.6 r270
J5: Bottom Overlay "GND" at 42.1,11.1 h0.6 r90; Bottom Overlay "VS" at 42.1,5.75 h0.6 r90; Bottom Overlay "VO" at 42.113,8.216 h0.6 r90
J6: Bottom Overlay "VCC" at 9.616,28.997 h0.6 r90; Bottom Overlay "MCLR" at 9.616,31.791 h0.6 r90; Bottom Overlay "GND" at 9.616,26.38 h0.6 r90; Bottom Overlay "PGD" at 9.616,23.942 h0.6 r90; Bottom Overlay "PGC" at 9.616,21.427 h0.6 r90; Bottom Overlay "NC" at 9.616,18.583 h0.6 r90
P1: Bottom Overlay "VCC" at 11.6,48.3 h0.6; Bottom Overlay "GND" at 9.05,48.3 h0.6
P2: Bottom Overlay "VCC" at 17.6,48.3 h0.6; Bottom Overlay "GND" at 15.05,48.3 h0.6